# Altium PCB MAGI'sPrototypeBoard.PcbDoc (part 1 of 3)
Units mil, origin at the board's own origin, x right, y up, seen from the top; angles counter-clockwise.
Board outline 6000 x 4000 mil, 2 copper layers (Top Layer, Bottom Layer); 30 components, 124 nets, 1722 pads, 44 vias.
Unrouted connection lines stored in the file: 29.
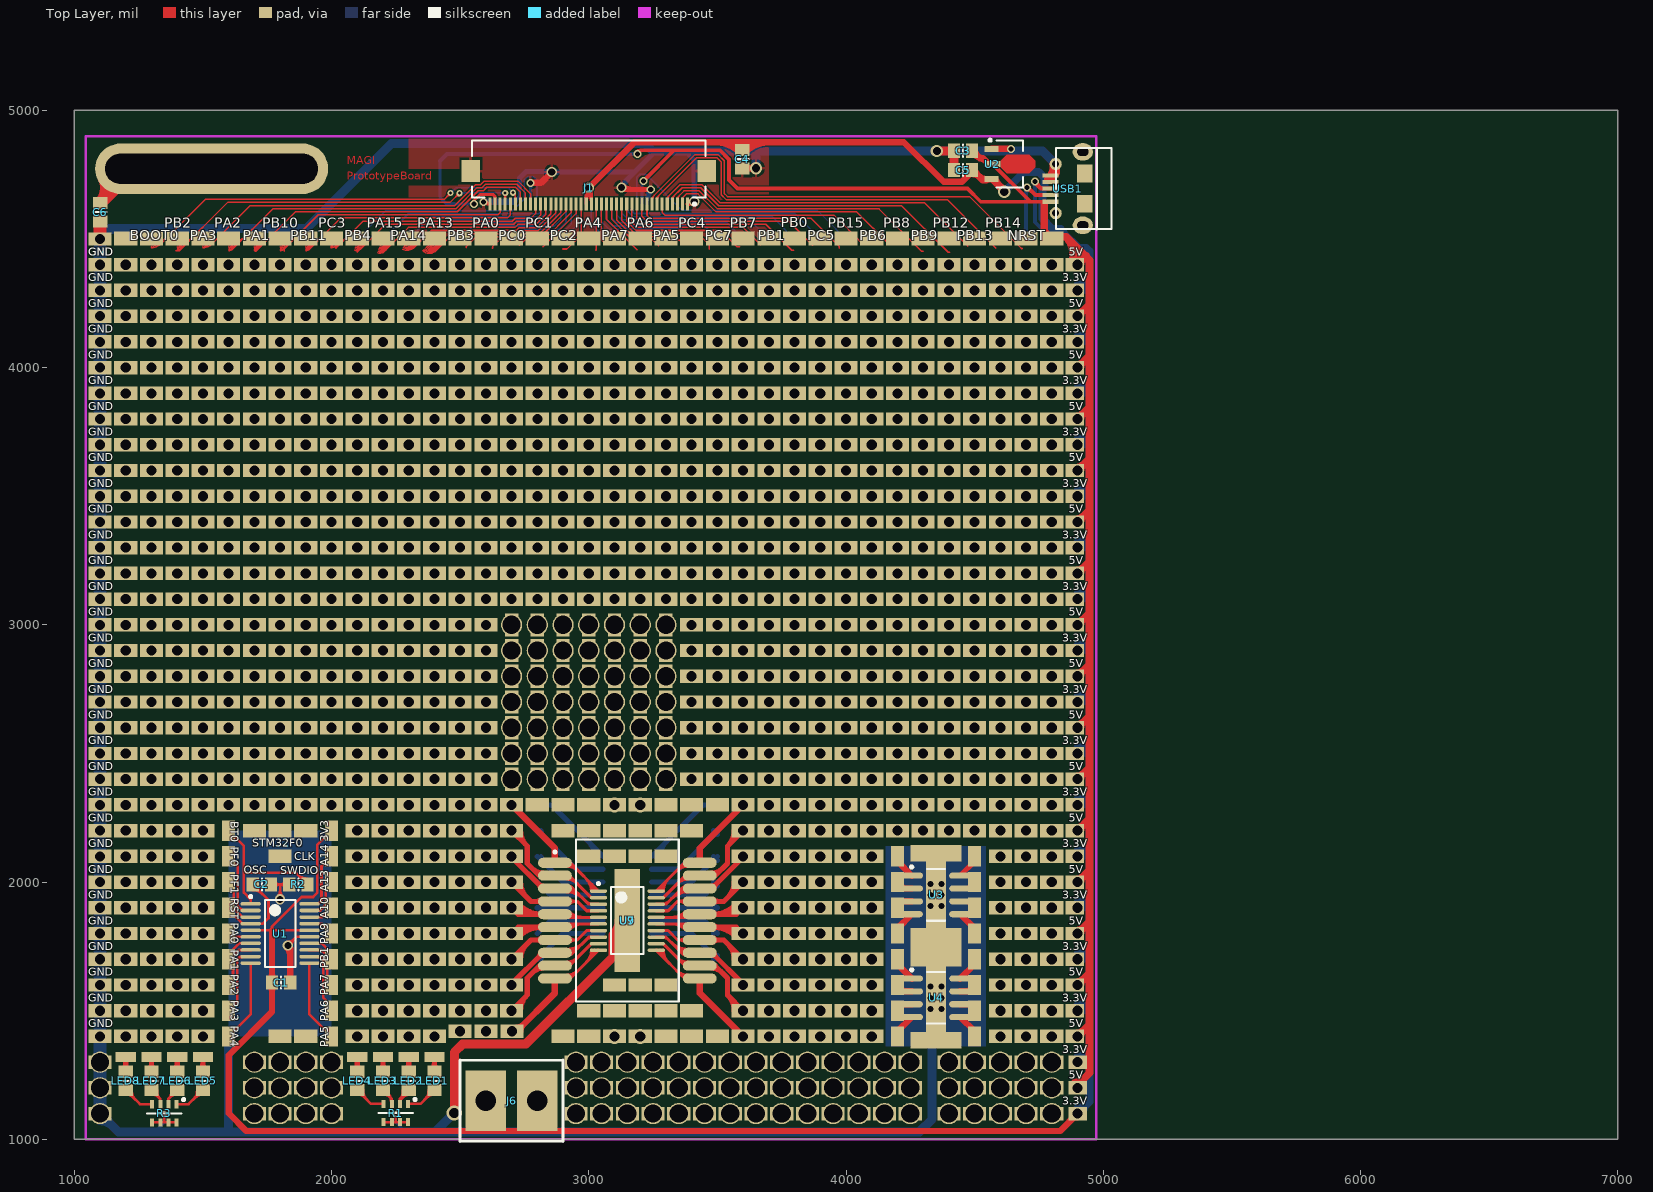
[diagram p0: Top Layer view]
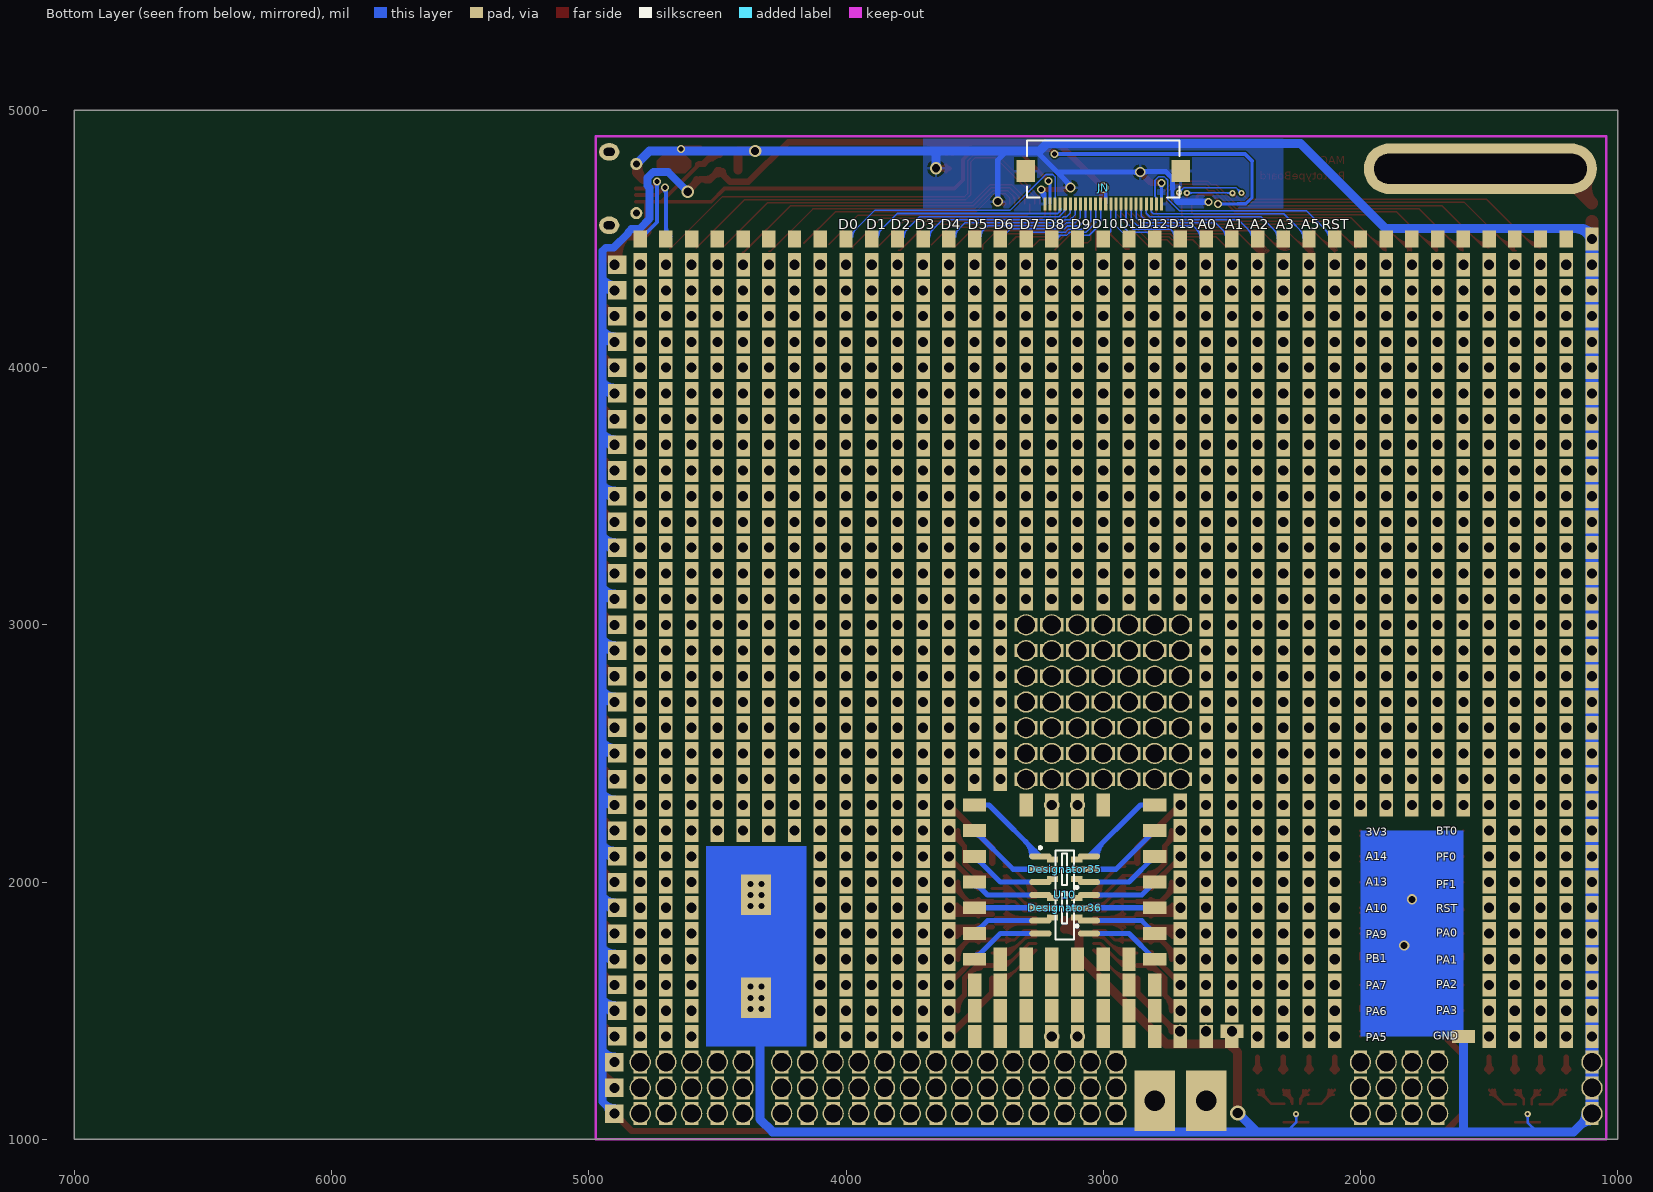
[diagram p1: Bottom Layer view, seen from below]

## Layer stack, top to bottom
Top Solder: solder mask 0.4, Solder Resist, Dk 3.5
Top Layer: signal copper 1.4
Dielectric 1: dielectric 12.6, FR-4, Dk 4.8
Bottom Layer: signal copper 1.4
Bottom Solder: solder mask 0.4, Solder Resist, Dk 3.5

## Board outline
1000,1000 7000,1000 7000,5000 1000,5000

## Design rules (kind name [scope] priority, off if disabled: settings)
Clearance [All] p1: gap=6
ComponentClearance [InNet('No Net') vs InNet('BOOT0')] p1: gap=10 collisioncheckmode=3 verticalgap=10 showdistances=FALSE
PolygonConnect [All] p1: connectstyle=Relief reliefconductorwidth=10 reliefentries=4 polygonreliefangle="90 Angle" airgapwidth=10
RoutingVias [All] p1: holewidth=28 width=50 viastyle="Through Hole" minholewidth=28 minwidth=50 maxholewidth=28 maxwidth=50
SolderMaskExpansion [All] p1: expansion=4
Width [All] p1: maxlimit=100 minlimit=6 preferedwidth=10
28 further rules are at their usual default settings.

## Classes and differential pairs
component class MAGI'sPrototypeBoard: C1 C2 C3 C5 J1 J3 LED1 LED2 LED3 LED4 R1 R2 U1 U2 U3 U4 U7 U9 U10 USB1

## Components (designator, comment, footprint, x,y, rotation, side; value= is the part's Value field where it differs from the comment)
C1 "10uf" 6-0805_n 1803.94,1609.06 r0 top
C2 "100nF" 6-0805_n 1729.13,1990.94 r180 top
C3 "10uf" 6-0805_n 4455,4843 r180 top
C4 "100nF" 6-0805_n 3597,4810 r270 top (schematic designator C2)
C5 "10uf" 6-0805_n 4455,4768 r180 top
C6 "100nF" 6-0805_n 1101,4604 r270 top (schematic designator C2)
Designator35 "Comment" TPS2513 3150,2050 r0 bottom
Designator36 "Comment" TPS2513 3150,1900 r0 bottom
J1 "FPC-40P" FFC/SM0.5-2H40 3000,4700 r180 top
J6 "Comment" 2P-Con 2700,1150 r180 top
JN "Comment" FFC/SM0.5-2H24 3000,4700 r0 bottom
LED1 "LED" 6-0805_N 2400,1227 r270 top
LED2 "LED" 6-0805_N 2300,1227 r270 top
LED3 "LED" 6-0805_N 2200,1227 r270 top
LED4 "LED" 6-0805_N 2100,1227 r270 top
LED5 "LED" 6-0805_N 1500,1227 r270 top
LED6 "LED" 6-0805_N 1400,1227 r270 top
LED7 "LED" 6-0805_N 1300,1227 r270 top
LED8 "LED" 6-0805_N 1200,1227 r270 top
R1 "0603*4" 0603*4 2250,1102 r270 top
R2 "10K" 6-0805_n 1870.87,1990.94 r0 top
R3 "0603*4" 0603*4 1350,1101 r270 top
U1 "STM32F030F4" STM32F030 1800,1800 r0 top
U2 "HS7333" HS7333 4636.92,4791.49 r0 top
U3 "TP4056" TP4056 4350,1950 r0 top
U4 "TP4056" TP4056 4350,1550 r0 top
U7 "MC33886" MC33886 3150,1850 r0 top
U9 "SN74LVC244A" SN74LVC244APWRG 3150,1850 r0 top
U10 "SN74ALVC08" SN74ALVC08D 3150,1950 r180 bottom
USB1 "USB_Micro" MicroUSB-B 4887,4696 r270 top

## Footprints (in the part's own frame and the unit in brackets; to place one, negate y for a bottom-side part, rotate by r counter-clockwise, add the part's x,y. Pads: shape width x height; smd on the part's side, far side on the other; paste and mask are expansions set on the pad)
2P-Con [mm]
  round 4 hole 2: 1(-2.54,0) 2(2.54,0)
  silkscreen extent -5.08,-4 5.08,4
6-0805_n [mm] "Chip Resistor, Body 2.0x1.2mm, IPC Medium Density"
  rect 1.2x1.4 smd: 1(-0.9,0) 2(0.9,0)
  silkscreen extent 0,-0.6 0,0.6, body extent -1.07,-0.7 1.07,0.7, height 0.7
6-0805_N [mm] "Chip Resistor, Body 2.0x1.2mm, IPC Medium Density"
  rect 1.2x1.4 smd: 1(-0.9,0) 2(0.9,0)
  silkscreen extent 0,-0.6 0,0.6, body extent -1.07,-0.7 1.07,0.7, height 0.7
0603*4 [mm]
  rect 0.8x0.4 smd: 1(-0.9,1.2) 2(-0.9,0.4) 3(-0.9,-0.4) 4(-0.9,-1.2) 5(0.9,-1.2) 6(0.9,-0.4) 7(0.9,0.4) 8(0.9,1.2)
  silkscreen extent -1.47,-1.7 0,2.02
FFC/SM0.5-2H24 [mm] "Connector; FH12 Series; 24 Position; 0.5mm Spaced Bottom Contact"
  rect 0.3x1.3 smd: 1(-5.75,1.625) 2(-5.25,1.625) 3(-4.75,1.625) 4(-4.25,1.625) 5(-3.75,1.625) 6(-3.25,1.625) 7(-2.75,1.625) 8(-2.25,1.625) 9(-1.75,1.625) 10(-1.25,1.625) 11(-0.75,1.625) 12(-0.25,1.625) 13(0.25,1.625) 14(0.75,1.625) 15(1.25,1.625) 16(1.75,1.625) 17(2.25,1.625) 18(2.75,1.625) 19(3.25,1.625) 20(3.75,1.625) 21(4.25,1.625) 22(4.75,1.625) 23(5.25,1.625) 24(5.75,1.625)
  rect 1.8x2.2 smd: 25(-7.65,-1.625) 26(7.65,-1.625)
  silkscreen extent -7.55,-4.62 7.55,0.97, body extent -7.55,-4.62 7.55,0.97, height 2
FFC/SM0.5-2H40 [mm] "Connector; FH12 Series; 40 Position; 0.5mm Spaced Bottom Contact"
  rect 0.3x1.3 smd: 1(-9.75,1.625) 2(-9.25,1.625) 3(-8.75,1.625) 4(-8.25,1.625) 5(-7.75,1.625) 6(-7.25,1.625) 7(-6.75,1.625) 8(-6.25,1.625) 9(-5.75,1.625) 10(-5.25,1.625) 11(-4.75,1.625) 12(-4.25,1.625) 13(-3.75,1.625) 14(-3.25,1.625) 15(-2.75,1.625) 16(-2.25,1.625) 17(-1.75,1.625) 18(-1.25,1.625) 19(-0.75,1.625) 20(-0.25,1.625) 21(0.25,1.625) 22(0.75,1.625) 23(1.25,1.625) 24(1.75,1.625) 25(2.25,1.625) 26(2.75,1.625) 27(3.25,1.625) 28(3.75,1.625) 29(4.25,1.625) 30(4.75,1.625) 31(5.25,1.625) 32(5.75,1.625) 33(6.25,1.625) 34(6.75,1.625) 35(7.25,1.625) 36(7.75,1.625) 37(8.25,1.625) 38(8.75,1.625) 39(9.25,1.625) 40(9.75,1.625)
  rect 1.8x2.2 smd: 41(-11.65,-1.625) 42(11.65,-1.625)
  silkscreen extent -11.55,-4.62 11.55,1.75, body extent -11.55,-4.62 11.55,0.97, height 2
HS7333 [mm] "SOT89, 3-Leads, Body 4.50x2.50mm, Pitch 1.50mm, Lead Span 4.1mm, IPC Medium Density"
  rect 1.4x0.6 smd: 1(-1.8,1.5) 3(-1.8,-1.5)
  rect 1.6x0.6 smd: 2(-1.7,0)
  Top Layer region: -0.9,0.3 -0.3,0.9 1.9,0.9 2.5,0.3 2.5,-0.3 1.9,-0.9 -0.3,-0.9 -0.9,-0.3
  silkscreen extent -2.07,-2.3 1.3,2.47, body extent -1.3,-2.3 1.3,2.3, height 1.6
MC33886 [mm]
  oval 3.35x1 smd: 1(-7.15,5.715) 2(-7.15,4.445) 3(-7.15,3.175) 4(-7.15,1.905) 5(-7.15,0.635) 6(-7.15,-0.635) 7(-7.15,-1.905) 8(-7.15,-3.175) 9(-7.15,-4.445) 10(-7.15,-5.715) 11(7.15,-5.715) 12(7.15,-4.445) 13(7.15,-3.175) 14(7.15,-1.905) 15(7.15,-0.635) 16(7.15,0.635) 17(7.15,1.905) 18(7.15,3.175) 19(7.15,4.445) 20(7.15,5.715)
  silkscreen extent -7.27,-8 5.07,8, body extent -5.55,-8 5.55,8, height 3.4
MicroUSB-B [mm]
  oval 1.7x2 hole 0.8 slot 1.1 at 90 deg: 0(-3.625,0.85) 0(3.625,0.85)
  round 1.2 hole 0.7: 0(-2.425,-1.825) 0(2.425,-1.825)
  rect 1.75x1.5 smd: 0(-1.499,1.041) 0(1.499,1.041)
  rect 0.4x1.6 smd: 1(1.3,-2.35) 2(0.65,-2.35) 3(0,-2.35) 4(-0.65,-2.35) 5(-1.3,-2.35)
  silkscreen extent -4,-1.8 4,3.67, body extent -4.1,-1.93 4.1,3.77, height 3
SN74ALVC08D [mm]
  oval 2.2x0.6 smd: 1(-2.4,3.81) 2(-2.4,2.54) 3(-2.4,1.27) 4(-2.4,0) 5(-2.4,-1.27) 6(-2.4,-2.54) 7(-2.4,-3.81) 8(2.4,-3.81) 9(2.4,-2.54) 10(2.4,-1.27) 11(2.4,0) 12(2.4,1.27) 13(2.4,2.54) 14(2.4,3.81)
  silkscreen extent -2.53,-4.4 0.9,4.78, body extent -2,-4.4 2,4.4, height 1.75
SN74LVC244APWRG [mm]
  oval 1.7x0.35 smd: 1(-2.85,2.925) 2(-2.85,2.275) 3(-2.85,1.625) 4(-2.85,0.975) 5(-2.85,0.325) 6(-2.85,-0.325) 7(-2.85,-0.975) 8(-2.85,-1.625) 9(-2.85,-2.275) 10(-2.85,-2.925) 11(2.85,-2.925) 12(2.85,-2.275) 13(2.85,-1.625) 14(2.85,-0.975) 15(2.85,-0.325) 16(2.85,0.325) 17(2.85,0.975) 18(2.85,1.625) 19(2.85,2.275) 20(2.85,2.925)
  silkscreen extent -2.97,-3.3 1.6,3.77, body extent -2.25,-3.3 2.25,3.3, height 1.2
STM32F030 [mm] "TSOP, 20-Leads, Body 6.50x4.40mm, Pitch 0.65mm, IPC Low Density"
  oval 2x0.35 smd: 1(-2.9,2.925) 2(-2.9,2.275) 3(-2.9,1.625) 4(-2.9,0.975) 5(-2.9,0.325) 6(-2.9,-0.325) 7(-2.9,-0.975) 8(-2.9,-1.625) 9(-2.9,-2.275) 10(-2.9,-2.925) 11(2.9,-2.925) 12(2.9,-2.275) 13(2.9,-1.625) 14(2.9,-0.975) 15(2.9,-0.325) 16(2.9,0.325) 17(2.9,0.975) 18(2.9,1.625) 19(2.9,2.275) 20(2.9,2.925)
  silkscreen extent -3.02,-3.3 1.5,3.77, body extent -2.25,-3.3 2.25,3.3, height 1.2
TP4056 [mm] "SOIC, 8-Leads, Body 4.90x3.90mm, Pitch 1.27mm, Thermal Pad 3.40.2x2.00.2mm, IPC Medium Density"
  oval 2.2x0.6 smd: 1(-2.4,1.905) 2(-2.4,0.635) 3(-2.4,-0.635) 4(-2.4,-1.905) 5(2.4,-1.905) 6(2.4,-0.635) 7(2.4,0.635) 8(2.4,1.905)
  rect 2x8 smd: 9(0,0)
  silkscreen extent -2.52,-2.55 0.9,2.88, body extent -2,-2.55 2,2.55, height 1.75
TPS2513 [mm]
  rect 1.1x0.6 smd: 1(-1.2,0.95) 2(-1.2,0) 3(-1.2,-0.95) 4(1.2,-0.95) 5(1.2,0) 6(1.2,0.95)
  silkscreen extent -1.32,-1.55 0.25,1.92, body extent -0.87,-1.52 0.87,1.53, height 1.45

## Part data
C1 C3 C5: library part "CAPACITOR POL", "Capacitor"
C2 C4 C6: library part CAP
J1: library part CON40, "Connector"
LED1 LED2 LED3 LED4 LED5 LED6 LED7 LED8: library part LED_3
R2: library part RES
U9: library part 74LVC244
USB1: "USB"

## Free pads (board coordinates)
  round 39.37 on Top Overlay: 0(2752,2344) 1(4228,2124) 2(4228,1723)
  round 47.24 on Top Paste: 0(4815.15,4600.53) 0(4815.15,4791.47)
  oval 78.74x66.93 on Top Paste: 0(4920.46,4553.28) 0(4920.46,4838.72)
  round 82.68 hole 70.87: 2(2700,2400) 2(2800,2400) 2(2900,2400) 2(3000,2400) 2(3100,2400) 2(3200,2400) 2(3300,2400) 2(3450,1100) 2(3450,1200) 2(3450,1300) 2(3550,1100) 2(3550,1200) 2(3550,1300) 2(3950,1100) 2(3950,1200) 2(3950,1300) 3(1700,1100) 3(1700,1200) 3(1700,1300) 3(2700,2500) 3(2800,2500) 3(2900,2500) 3(3000,2500) 3(3100,2500) 3(3200,2500) 3(3300,2500) 3(3650,1100) 3(3650,1200) 3(3650,1300) 3(4050,1100) 3(4050,1200) 3(4050,1300) 4(1800,1100) 4(1800,1200) 4(1800,1300) 4(2700,2600) 4(2800,2600) 4(2900,2600) 4(3000,2600) 4(3100,2600) 4(3200,2600) 4(3300,2600) 4(3750,1100) 4(3750,1200) 4(3750,1300) 4(4150,1100) 4(4150,1200) 4(4150,1300) 5(1900,1100) 5(1900,1200) 5(1900,1300) 5(2700,2700) 5(2800,2700) 5(2900,2700) 5(3000,2700) 5(3100,2700) 5(3200,2700) 5(3300,2700) 5(3850,1100) 5(3850,1200) 5(3850,1300) 5(4250,1100) 5(4250,1200) 5(4250,1300) 6(1100,1100) 6(1100,1200) 6(1100,1300) 6(2000,1100) 6(2000,1200) 6(2000,1300) 6(2700,2800) 6(2800,2800) 6(2900,2800) 6(3000,2800) 6(3100,2800) 6(3200,2800) 6(3300,2800) 7(2700,2900) 7(2800,2900) 7(2900,2900) 7(3000,2900) 7(3100,2900) 7(3200,2900) 7(3300,2900) 7(4400,1100) 7(4400,1200) 7(4400,1300) 8(2700,2900) 8(2800,2900) 8(2900,2900) 8(3000,2900) 8(3100,2900) 8(3200,2900) 8(3300,2900) 8(4400,1100) 8(4400,1200) 8(4400,1300) 9(2700,3000) 9(2800,3000) 9(2900,3000) 9(2950,1100) 9(2950,1200) 9(2950,1300) 9(3000,3000) 9(3100,3000) 9(3200,3000) 9(3300,3000) 9(4500,1100) 9(4500,1200) 9(4500,1300) 10(3050,1100) 10(3050,1200) 10(3050,1300) 10(4600,1100) 10(4600,1200) 10(4600,1300) 11(3150,1100) 11(3150,1200) 11(3150,1300) 11(4700,1100) 11(4700,1200) 11(4700,1300) 12(3250,1100) 12(3250,1200) 12(3250,1300) 12(4800,1100) 12(4800,1200) 12(4800,1300) 13(3350,1100) 13(3350,1200) 13(3350,1300)
  round 39.37 on Bottom Overlay: 3(2753,2343) 4(4228,2123) 5(4228,1724)
  rect 98.43x400 smd: 14(3150,1850)
  rect 78.74x40 smd: 23(1200,1320) 24(1300,1320) 25(1400,1320) 26(1500,1320) 27(2100,1320) 28(2200,1320) 29(2300,1320) 30(2400,1320)
  rect 50x78.74 smd: 31(1600,2200) 32(1600,2100) 33(1600,2000) 34(1600,1900) 35(1600,1800) 36(1600,1700) 37(1600,1600) 38(1600,1500) 39(1600,1400) 40(2000,2100) 40(2000,2200) 41(2000,2000) 42(2000,1900) 43(2000,1800) 44(2000,1700) 45(2000,1600) 46(2000,1500) 47(2000,1400) 48(4500,1700) 49(4500,1600) 50(4500,1500) 51(4500,1400) 52(4200,1400) 53(4200,1500) 54(4200,1600) 55(4200,1700) 56(4200,1800) 57(4200,1900) 58(4200,2000) 59(4200,2100) 60(4500,2100) 61(4500,2000) 62(4500,1900) 63(4500,1800)
  rect 90x52 / inner rect 40x40 / far side rect 52x90 all layers, no hole: 62(1100,1100) 62(1100,1200) 62(1100,1300) 62(1700,1100) 62(1700,1200) 62(1700,1300) 62(1800,1100) 62(1800,1200) 62(1800,1300) 62(1900,1100) 62(1900,1200) 62(1900,1300) 62(2000,1100) 62(2000,1200) 62(2000,1300) 62(2950,1100) 62(2950,1200) 62(2950,1300) 62(3050,1100) 62(3050,1200) 62(3050,1300) 62(3150,1100) 62(3150,1200) 62(3150,1300) 62(3250,1100) 62(3250,1200) 62(3250,1300) 62(3350,1100) 62(3350,1200) 62(3350,1300) 62(3450,1100) 62(3450,1200) 62(3450,1300) 62(3550,1100) 62(3550,1200) 62(3550,1300) 62(3650,1100) 62(3650,1200) 62(3650,1300) 62(3750,1100) 62(3750,1200) 62(3750,1300) 62(3850,1100) 62(3850,1200) 62(3850,1300) 62(3950,1100) 62(3950,1200) 62(3950,1300) 62(4050,1100) 62(4050,1200) 62(4050,1300) 62(4150,1100) 62(4150,1200) 62(4150,1300) 62(4250,1100) 62(4250,1200) 62(4250,1300) 62(4400,1100) 62(4400,1200) 62(4400,1300) 62(4500,1100) 62(4500,1200) 62(4500,1300) 62(4600,1100) 62(4600,1200) 62(4600,1300) 62(4700,1100) 62(4700,1200) 62(4700,1300) 62(4800,1100) 62(4800,1200) 62(4800,1300)
  rect 90x52 / inner rect 40x40 / far side rect 52x90 hole 39.37: 62(1100,2600) 62(1100,4500) 62(1200,1900) 62(1200,2600) 62(1300,1900) 62(1300,2600) 62(1400,1900) 62(1400,2600) 62(1500,1900) 62(1500,2600) 62(1600,2600) 62(1700,2600) 62(1800,2600) 62(1900,2600) 62(2000,2600) 62(2100,1900) 62(2100,2600) 62(2200,1900) 62(2200,2600) 62(2300,1900) 62(2300,2600) 62(2400,1900) 62(2400,2600) 62(2500,1700) 62(2500,2600) 62(2600,1700) 62(2600,2600) 62(3400,2600) 62(3500,2600) 62(3600,2600) 62(3700,1900) 62(3700,2600) 62(3800,1900) 62(3800,2600) 62(3900,1900) 62(3900,2600) 62(4000,1900) 62(4000,2600) 62(4100,1900) 62(4100,2600) 62(4200,2600) 62(4300,2600) 62(4400,2600) 62(4500,2600) 62(4600,1900) 62(4600,2600) 62(4700,1900) 62(4700,2600) 62(4800,1900) 62(4800,2600) 63(1100,2500) 63(1200,1800) 63(1200,2500) 63(1300,1800) 63(1300,2500) 63(1400,1800) 63(1400,2500) 63(1500,1800) 63(1500,2500) 63(1600,2500) 63(1700,2500) 63(1800,2500) 63(1900,2500) 63(2000,2500) 63(2100,1800) 63(2100,2500) 63(2200,1800) 63(2200,2500) 63(2300,1800) 63(2300,2500) 63(2400,1800) 63(2400,2500) 63(2500,1600) 63(2500,2300) 63(2500,2500) 63(2600,1600) 63(2600,2300) 63(2600,2500) 63(3400,2500) 63(3500,2500) 63(3600,2500) 63(3700,1800) 63(3700,2500) 63(3800,1800) 63(3800,2500) 63(3900,1800) 63(3900,2500) 63(4000,1800) 63(4000,2500) 63(4100,1800) 63(4100,2500) 63(4200,2500) 63(4300,2500) 63(4400,2500) 63(4500,2500) 63(4600,1800) 63(4600,2500) 63(4700,1800) 63(4700,2500) 63(4800,1800) 63(4800,2500) 64(1100,2400) 64(1100,4400) 64(1200,1700) 64(1200,2400) 64(1200,4400) 64(1300,1700) 64(1300,2400) 64(1300,4400) 64(1400,1700) 64(1400,2400) 64(1400,4400) 64(1500,1700) 64(1500,2400) 64(1500,4400) 64(1600,2400) 64(1600,4400) 64(1700,2400) 64(1700,4400) 64(1800,2400) 64(1800,4400) 64(1900,2400) 64(1900,4400) 64(2000,2400) 64(2000,4400) 64(2100,1700) 64(2100,2400) 64(2100,4400) 64(2200,1700) 64(2200,2400) 64(2200,4400) 64(2300,1700) 64(2300,2400) 64(2300,4400) 64(2400,1700) 64(2400,2400) 64(2400,4400) 64(2500,1500) 64(2500,2200) 64(2500,2400) 64(2500,4400) 64(2600,1500) 64(2600,2200) 64(2600,2400) 64(2600,4400) 64(2700,1500) 64(2700,1600) 64(2700,1700) 64(2700,1800) 64(2700,1900) 64(2700,2000) 64(2700,2100) 64(2700,2200) 64(2700,2300) 64(2700,4400) 64(2800,4400) 64(2900,4400) 64(3000,4400) 64(3100,4400) 64(3200,4400) 64(3300,4400) 64(3400,2400) 64(3400,4400) 64(3500,2400) 64(3500,4400) 64(3600,2400) 64(3600,4400) 64(3700,1700) 64(3700,2400) 64(3700,4400) 64(3800,1700) 64(3800,2400) 64(3800,4400) 64(3900,1700) 64(3900,2400) 64(3900,4400) 64(4000,1700) 64(4000,2400) 64(4000,4400) 64(4100,1700) 64(4100,2400) 64(4100,4400) 64(4200,2400) 64(4200,4400) 64(4300,2400) 64(4300,4400) 64(4400,2400) 64(4400,4400) 64(4500,2400) 64(4500,4400) 64(4600,1700) 64(4600,2400) 64(4600,4400) 64(4700,1700) 64(4700,2400) 64(4700,4400) 64(4800,1700) 64(4800,2400) 64(4800,4400) 65(1100,2300) 65(1100,4300) 65(1200,4300) 65(1300,4300) 65(1400,4300) 65(1500,4300) 65(1600,4300) 65(1700,4300) 65(1800,4300) 65(1900,4300) 65(2000,4300) 65(2100,4300) 65(2200,4300) 65(2300,4300) 65(2400,4300) 65(2500,4300) 65(2600,4300) 65(2700,4300) 65(2800,4300) 65(2900,4300) 65(3000,4300) 65(3100,4300) 65(3200,4300) 65(3300,4300) 65(3400,4300) 65(3500,4300) 65(3600,2300) 65(3600,4300) 65(3700,4300) 65(3800,4300) 65(3900,4300) 65(4000,4300) 65(4100,4300) 65(4200,4300) 65(4300,4300) 65(4400,4300) 65(4500,4300) 65(4600,4300) 65(4700,4300) 65(4800,4300) 66(1100,2200) 66(1100,4200) 66(1200,4200) 66(1300,4200) 66(1400,4200) 66(1500,4200) 66(1600,4200) 66(1700,4200) 66(1800,4200) 66(1900,4200) 66(2000,4200) 66(2100,4200) 66(2200,4200) 66(2300,4200) 66(2400,4200) 66(2500,4200) 66(2600,4200) 66(2700,4200) 66(2800,4200) 66(2900,4200) 66(3000,4200) 66(3100,4200) 66(3200,4200) 66(3300,4200) 66(3400,4200) 66(3500,4200) 66(3600,2200) 66(3600,4200) 66(3700,4200) 66(3800,4200) 66(3900,4200) 66(4000,4200) 66(4100,4200) 66(4200,4200) 66(4300,4200) 66(4400,4200) 66(4500,4200) 66(4600,4200) 66(4700,4200) 66(4800,4200) 67(1100,2100) 67(1100,4100) 67(1200,4100) 67(1300,4100) 67(1400,4100) 67(1500,4100) 67(1600,4100) 67(1700,4100) 67(1800,4100) 67(1900,4100) 67(2000,4100) 67(2100,4100) 67(2200,4100) 67(2300,4100) 67(2400,4100) 67(2500,4100) 67(2600,4100) 67(2700,4100) 67(2800,4100) 67(2900,4100) 67(3000,4100) 67(3100,4100) 67(3200,4100) 67(3300,4100) 67(3400,4100) 67(3500,4100) 67(3600,2100) 67(3600,4100) 67(3700,4100) 67(3800,4100) 67(3900,4100) 67(4000,4100) 67(4100,4100) 67(4200,4100) 67(4300,4100) 67(4400,4100) 67(4500,4100) 67(4600,4100) 67(4700,4100) 67(4800,4100) 68(1100,2000) 68(1100,4000) 68(1200,4000) 68(1300,4000) 68(1400,4000) 68(1500,4000) 68(1600,4000) 68(1700,4000) 68(1800,4000) 68(1900,4000) 68(2000,4000) 68(2100,4000) 68(2200,4000) 68(2300,4000) 68(2400,4000) 68(2500,4000) 68(2600,4000) 68(2700,4000) 68(2800,4000) 68(2900,4000) 68(3000,4000) 68(3100,4000) 68(3200,4000) 68(3300,4000) 68(3400,4000) 68(3500,4000) 68(3600,2000) 68(3600,4000) 68(3700,4000) 68(3800,4000) 68(3900,4000) 68(4000,4000) 68(4100,4000) 68(4200,4000) 68(4300,4000) 68(4400,4000) 68(4500,4000) 68(4600,4000) 68(4700,4000) 68(4800,4000) 69(1100,1900) 69(1100,3900) 69(1200,3900) 69(1300,3900) 69(1400,3900) 69(1500,3900) 69(1600,3900) 69(1700,3900) 69(1800,3900) 69(1900,3900) 69(2000,3900) 69(2100,3900) 69(2200,3900) 69(2300,3900) 69(2400,3900) 69(2500,3900) 69(2600,3900) 69(2700,3900) 69(2800,3900) 69(2900,3900) 69(3000,3900) 69(3100,3900) 69(3200,3900) 69(3300,3900) 69(3400,3900) 69(3500,3900) 69(3600,1900) 69(3600,3900) 69(3700,3900) 69(3800,3900) 69(3900,3900) 69(4000,3900) 69(4100,3900) 69(4200,3900) 69(4300,3900) 69(4400,3900) 69(4500,3900) 69(4600,3900) 69(4700,3900) 69(4800,3900) 70(1100,1800) 70(1100,3800) 70(1200,3800) 70(1300,3800) 70(1400,3800) 70(1500,3800) 70(1600,3800) 70(1700,3800) 70(1800,3800) 70(1900,3800) 70(2000,3800) 70(2100,3800) 70(2200,3800) 70(2300,3800) 70(2400,3800) 70(2500,3800) 70(2600,3800) 70(2700,3800) 70(2800,3800) 70(2900,3800) 70(3000,3800) 70(3100,3800) 70(3200,3800) 70(3300,3800) 70(3400,3800) 70(3500,3800) 70(3600,1800) 70(3600,3800) 70(3700,3800) 70(3800,3800) 70(3900,3800) 70(4000,3800) 70(4100,3800) 70(4200,3800) 70(4300,3800) 70(4400,3800) 70(4500,3800) 70(4600,3800) 70(4700,3800) 70(4800,3800) 72(1100,1700) 72(1100,3700) 72(1200,3700) 72(1300,3700) 72(1400,3700) 72(1500,3700) 72(1600,3700) 72(1700,3700) 72(1800,3700) 72(1900,3700) 72(2000,3700) 72(2100,3700) 72(2200,3700) 72(2300,3700) 72(2400,3700) 72(2500,3700) 72(2600,3700) 72(2700,3700) 72(2800,3700) 72(2900,3700) 72(3000,3700) 72(3100,3700) 72(3200,3700) 72(3300,3700) 72(3400,3700) 72(3500,3700) 72(3600,1700) 72(3600,3700) 72(3700,3700) 72(3800,3700) 72(3900,3700) 72(4000,3700) 72(4100,3700) 72(4200,3700) 72(4300,3700) 72(4400,3700) 72(4500,3700) 72(4600,3700) 72(4700,3700) 72(4800,3700) 73(1100,1600) 73(1100,3600) 73(1200,3600) 73(1300,3600) 73(1400,3600) 73(1500,3600) 73(1600,3600) 73(1700,3600) 73(1800,3600) 73(1900,3600) 73(2000,3600) 73(2100,3600) 73(2200,3600) 73(2300,3600) 73(2400,3600) 73(2500,3600) 73(2600,3600) 73(2700,3600) 73(2800,3600) 73(2900,3600) 73(3000,3600) 73(3100,3600) 73(3200,3600) 73(3300,3600) 73(3400,3600) 73(3500,3600) 73(3600,1600) 73(3600,3600) 73(3700,3600) 73(3800,3600) 73(3900,3600) 73(4000,3600) 73(4100,3600) 73(4200,3600) 73(4300,3600) 73(4400,3600) 73(4500,3600) 73(4600,3600) 73(4700,3600) 73(4800,3600) 74(1100,1500) 74(1100,3500) 74(1200,3500) 74(1300,3500) 74(1400,3500) 74(1500,3500) 74(1600,3500) 74(1700,3500) 74(1800,3500) 74(1900,3500) 74(2000,3500) 74(2100,3500) 74(2200,3500) 74(2300,3500) 74(2400,3500) 74(2500,3500) 74(2600,3500) 74(2700,3500) 74(2800,3500) 74(2900,3500) 74(3000,3500) 74(3100,3500) 74(3200,3500) 74(3300,3500) 74(3400,3500) 74(3500,3500) 74(3600,1500) 74(3600,3500) 74(3700,3500) 74(3800,3500) 74(3900,3500) 74(4000,3500) 74(4100,3500) 74(4200,3500) 74(4300,3500) 74(4400,3500) 74(4500,3500) 74(4600,3500) 74(4700,3500) 74(4800,3500) 75(1100,1400) 75(1100,3400) 75(1200,3400) 75(1300,3400) 75(1400,3400) 75(1500,3400) 75(1600,3400) 75(1700,3400) 75(1800,3400) 75(1900,3400) 75(2000,3400) 75(2100,3400) 75(2200,3400) 75(2300,3400) 75(2400,3400) 75(2500,3400) 75(2600,3400) 75(2700,3400) 75(2800,3400) 75(2900,3400) 75(3000,3400) 75(3100,3400) 75(3200,3400) 75(3300,3400) 75(3400,3400) 75(3500,3400) 75(3600,1400) 75(3600,3400) 75(3700,3400) 75(3800,3400) 75(3900,3400) 75(4000,3400) 75(4100,3400) 75(4200,3400) 75(4300,3400) 75(4400,3400) 75(4500,3400) 75(4600,3400) 75(4700,3400) 75(4800,3400) 76(1100,3000) 76(1100,3200) 76(1200,1600) 76(1200,2300) 76(1200,3000) 76(1200,3200) 76(1300,1600) 76(1300,2300) 76(1300,3000) 76(1300,3200) 76(1400,1600) 76(1400,2300) 76(1400,3000) 76(1400,3200) 76(1500,1600) 76(1500,2300) 76(1500,3000) 76(1500,3200) 76(1600,2300) 76(1600,3000) 76(1600,3200) 76(1700,2300) 76(1700,3000) 76(1700,3200) 76(1800,2300) 76(1800,3000) 76(1800,3200) 76(1900,2300) 76(1900,3000) 76(1900,3200) 76(2000,2300) 76(2000,3000) 76(2000,3200) 76(2100,1600) 76(2100,2300) 76(2100,3000) 76(2100,3200) 76(2200,1600) 76(2200,2300) 76(2200,3000) 76(2200,3200) 76(2300,1600) 76(2300,2300) 76(2300,3000) 76(2300,3200) 76(2400,1600) 76(2400,2300) 76(2400,3000) 76(2400,3200) 76(2500,2100) 76(2500,3000) 76(2500,3200) 76(2600,2100) 76(2600,3000) 76(2600,3200) 76(2700,3200) 76(2800,3200) 76(2900,3200) 76(3000,3200) 76(3100,3200) 76(3200,3200) 76(3300,3200) 76(3400,3000) 76(3400,3200) 76(3500,3000) 76(3500,3200) 76(3600,3000) 76(3600,3200) 76(3700,1600) 76(3700,2300) 76(3700,3000) 76(3700,3200) 76(3800,1600) 76(3800,2300) 76(3800,3000) 76(3800,3200) 76(3900,1600) 76(3900,2300) 76(3900,3000) 76(3900,3200) 76(4000,1600) 76(4000,2300) 76(4000,3000) 76(4000,3200) 76(4100,1600) 76(4100,2300) 76(4100,3000) 76(4100,3200) 76(4200,2200) 76(4200,2300) 76(4200,3000) 76(4200,3200) 76(4300,2200) 76(4300,2300) 76(4300,3000) 76(4300,3200) 76(4400,2200) 76(4400,2300) 76(4400,3000) 76(4400,3200) 76(4500,2200) 76(4500,2300) 76(4500,3000) 76(4500,3200) 76(4600,1600) 76(4600,2300) 76(4600,3000) 76(4600,3200) 76(4700,1600) 76(4700,2300) 76(4700,3000) 76(4700,3200) 76(4800,1600) 76(4800,2300) 76(4800,3000) 76(4800,3200) 77(1100,3300) 77(1200,3300) 77(1300,3300) 77(1400,3300) 77(1500,3300) 77(1600,3300) 77(1700,3300) 77(1800,3300) 77(1900,3300) 77(2000,3300) 77(2100,3300) 77(2200,3300) 77(2300,3300) 77(2400,3300) 77(2500,3300) 77(2600,3300) 77(2700,3300) 77(2800,3300) 77(2900,3300) 77(3000,3300) 77(3100,3300) 77(3200,3300) 77(3300,3300) 77(3400,3300) 77(3500,3300) 77(3600,3300) 77(3700,3300) 77(3800,3300) 77(3900,3300) 77(4000,3300) 77(4100,3300) 77(4200,3300) 77(4300,3300) 77(4400,3300) 77(4500,3300) 77(4600,3300) 77(4700,3300) 77(4800,3300) 78(1100,2700) 78(1100,2800) 78(1100,2900) 78(1100,3100) 78(1200,1400) 78(1200,1500) 78(1200,2000) 78(1200,2100) 78(1200,2200) 78(1200,2700) 78(1200,2800) 78(1200,2900) 78(1200,3100) 78(1300,1400) 78(1300,1500) 78(1300,2000) 78(1300,2100) 78(1300,2200) 78(1300,2700) 78(1300,2800) 78(1300,2900) 78(1300,3100) 78(1400,1400) 78(1400,1500) 78(1400,2000) 78(1400,2100) 78(1400,2200) 78(1400,2700) 78(1400,2800) 78(1400,2900) 78(1400,3100) 78(1500,1400) 78(1500,1500) 78(1500,2000) 78(1500,2100) 78(1500,2200) 78(1500,2700) 78(1500,2800) 78(1500,2900) 78(1500,3100) 78(1600,2700) 78(1600,2800) 78(1600,2900) 78(1600,3100) 78(1700,2700) 78(1700,2800) 78(1700,2900) 78(1700,3100) 78(1800,2700) 78(1800,2800) 78(1800,2900) 78(1800,3100) 78(1900,2700) 78(1900,2800) 78(1900,2900) 78(1900,3100) 78(2000,2700) 78(2000,2800) 78(2000,2900) 78(2000,3100) 78(2100,1400) 78(2100,1500) 78(2100,2000) 78(2100,2100) 78(2100,2200) 78(2100,2700) 78(2100,2800) 78(2100,2900) 78(2100,3100) 78(2200,1400) 78(2200,1500) 78(2200,2000) 78(2200,2100) 78(2200,2200) 78(2200,2700) 78(2200,2800) 78(2200,2900) 78(2200,3100) 78(2300,1400) 78(2300,1500) 78(2300,2000) 78(2300,2100) 78(2300,2200) 78(2300,2700) 78(2300,2800) 78(2300,2900) 78(2300,3100) 78(2400,1400) 78(2400,1500) 78(2400,2000) 78(2400,2100) 78(2400,2200) 78(2400,2700) 78(2400,2800) 78(2400,2900) 78(2400,3100) 78(2500,1800) 78(2500,1900) 78(2500,2000) 78(2500,2700) 78(2500,2800) 78(2500,2900) 78(2500,3100) 78(2600,1800) 78(2600,1900) 78(2600,2000) 78(2600,2700) 78(2600,2800) 78(2600,2900) 78(2600,3100) 78(2700,3100) 78(2800,3100) 78(2900,3100) 78(3000,3100) 78(3100,3100) 78(3200,3100) 78(3300,3100) 78(3400,2700) 78(3400,2800) 78(3400,2900) 78(3400,3100) 78(3500,2700) 78(3500,2800) 78(3500,2900) 78(3500,3100) 78(3600,2700) 78(3600,2800) 78(3600,2900) 78(3600,3100) 78(3700,1400) 78(3700,1500) 78(3700,2000) 78(3700,2100) 78(3700,2200) 78(3700,2700) 78(3700,2800) 78(3700,2900) 78(3700,3100) 78(3800,1400) 78(3800,1500) 78(3800,2000) 78(3800,2100) 78(3800,2200) 78(3800,2700) 78(3800,2800) 78(3800,2900) 78(3800,3100) 78(3900,1400) 78(3900,1500) 78(3900,2000) 78(3900,2100) 78(3900,2200) 78(3900,2700) 78(3900,2800) 78(3900,2900) 78(3900,3100) 78(4000,1400) 78(4000,1500) 78(4000,2000) 78(4000,2100) 78(4000,2200) 78(4000,2700) 78(4000,2800) 78(4000,2900) 78(4000,3100) 78(4100,1400) 78(4100,1500) 78(4100,2000) 78(4100,2100) 78(4100,2200) 78(4100,2700) 78(4100,2800) 78(4100,2900) 78(4100,3100) 78(4200,2700) 78(4200,2800) 78(4200,2900) 78(4200,3100) 78(4300,2700) 78(4300,2800) 78(4300,2900) 78(4300,3100) 78(4400,2700) 78(4400,2800) 78(4400,2900) 78(4400,3100) 78(4500,2700) 78(4500,2800) 78(4500,2900) 78(4500,3100) 78(4600,1400) 78(4600,1500) 78(4600,2000) 78(4600,2100) 78(4600,2200) 78(4600,2700) 78(4600,2800) 78(4600,2900) 78(4600,3100) 78(4700,1400) 78(4700,1500) 78(4700,2000) 78(4700,2100) 78(4700,2200) 78(4700,2700) 78(4700,2800) 78(4700,2900) 78(4700,3100) 78(4800,1400) 78(4800,1500) 78(4800,2000) 78(4800,2100) 78(4800,2200) 78(4800,2700) 78(4800,2800) 78(4800,2900) 78(4800,3100)
  rect 52x65 smd far side: 62(1200,4500) 62(1300,4500) 62(1400,4500) 62(1500,4500) 62(1600,4500) 62(1700,4500) 62(1800,4500) 62(1900,4500) 62(2000,4500) 62(2100,4500) 62(2200,4500) 62(2300,4500) 62(2400,4500) 62(2500,4500) 62(2600,4500) 62(2700,4500) 62(2800,4500) 62(2900,4500) 62(3000,4500) 62(3100,4500) 62(3200,4500) 62(3300,4500) 62(3400,4500) 62(3500,4500) 62(3600,4500) 62(3700,4500) 62(3800,4500) 62(3900,4500) 62(4000,4500) 62(4100,4500) 62(4200,4500) 62(4300,4500) 62(4400,4500) 62(4500,4500) 62(4600,4500) 62(4700,4500) 62(4800,4500)
  rect 90x55 smd: 62(1200,4502) 62(1300,4502) 62(1400,4502) 62(1500,4502) 62(1600,4502) 62(1700,4502) 62(1800,4502) 62(1900,4502) 62(2000,4502) 62(2100,4502) 62(2200,4502) 62(2300,4502) 62(2400,4502) 62(2500,4502) 62(2600,4502) 62(2700,4502) 62(2800,4502) 62(2900,4502) 62(3000,4502) 62(3100,4502) 62(3200,4502) 62(3300,4502) 62(3400,4502) 62(3500,4502) 62(3600,4502) 62(3700,4502) 62(3800,4502) 62(3900,4502) 62(4000,4502) 62(4100,4502) 62(4200,4502) 62(4300,4502) 62(4400,4502) 62(4500,4502) 62(4600,4502) 62(4700,4502) 62(4800,4502)
  rect 52x90 / inner rect 40x40 / far side rect 90x52 all layers, no hole: 62(2700,2400) 62(2700,2500) 62(2700,2600) 62(2700,2700) 62(2700,2800) 62(2700,2900) 62(2700,3000) 62(2800,2400) 62(2800,2500) 62(2800,2600) 62(2800,2700) 62(2800,2800) 62(2800,2900) 62(2800,3000) 62(2900,2400) 62(2900,2500) 62(2900,2600) 62(2900,2700) 62(2900,2800) 62(2900,2900) 62(2900,3000) 62(3000,2400) 62(3000,2500) 62(3000,2600) 62(3000,2700) 62(3000,2800) 62(3000,2900) 62(3000,3000) 62(3100,2400) 62(3100,2500) 62(3100,2600) 62(3100,2700) 62(3100,2800) 62(3100,2900) 62(3100,3000) 62(3200,2400) 62(3200,2500) 62(3200,2600) 62(3200,2700) 62(3200,2800) 62(3200,2900) 62(3200,3000) 62(3300,2400) 62(3300,2500) 62(3300,2600) 62(3300,2700) 62(3300,2800) 62(3300,2900) 62(3300,3000)
  rect 72x52 / inner rect 40x40 / far side rect 72x72 all layers, no hole: 62(4900,1100) 62(4900,1200) 62(4900,1300)
  rect 72x52 / inner rect 40x40 / far side rect 72x72 hole 39.37 copper offset -10,0: 62(4900,2600) 63(4900,2500) 64(4900,2400) 64(4900,4400) 65(4900,2300) 65(4900,4300) 66(4900,2200) 66(4900,4200) 67(4900,2100) 67(4900,4100) 68(4900,2000) 68(4900,4000) 69(4900,1900) 69(4900,3900) 70(4900,1800) 70(4900,3800) 72(4900,1700) 72(4900,3700) 73(4900,1600) 73(4900,3600) 74(4900,1500) 74(4900,3500) 75(4900,1400) 75(4900,3400) 76(4900,3000) 76(4900,3200) 77(4900,3300) 78(4900,2700) 78(4900,2800) 78(4900,2900) 78(4900,3100)
  rect 90x52 / inner rect 40x40 / far side rect 90x52 hole 39.37: 64(2500,1420)
  rect 90x52 / inner rect 40x40 / far side round 52 hole 39.37: 64(2600,1420) 64(2701,1420)
  rect 196.85x62.99 smd: 64(4350,2112) 68(4350,1385)
  rect 196.85x78.74 smd: 65(4350,1783) 66(4350,1712)
  rect 118.11x157.48 smd far side: 69(4350,1950) 70(4350,1550)
  rect 90x50 smd far side: 73(2800,2300) 74(2800,2200) 75(2800,2100) 76(2800,2000) 77(2800,1900) 78(2800,1800) 79(1600,1400) 79(2800,1700) 80(3500,1700) 81(3500,1800) 82(3500,1900) 83(3500,2000) 84(3500,2100) 85(3500,2200) 86(3500,2300)
  rect 157.48x236.22 all layers, no hole: 88(2800,1150) 89(2600,1150)
  rect 90x52 smd: 92(2800,2300) 93(2900,2300) 94(3000,2300) 95(3100,2300) 96(3200,2300) 97(3300,2300) 98(3400,2300) 99(3500,2300) 100(2900,2200) 101(3000,2200) 102(3100,2200) 103(3200,2200) 104(3300,2200) 105(3400,2200) 106(3000,2100) 107(3100,2100) 108(3200,2100) 109(3300,2100) 112(3300,1600) 113(3200,1600) 114(3200,1500) 115(3300,1500) 116(3400,1500) 117(3100,1500) 118(3000,1500) 118(3100,1600) 121(2900,1400) 122(3000,1400) 123(3100,1400) 124(3200,1400) 125(3300,1400) 126(3400,1400) 127(3500,1400) 129(1800,2100) 130(1700,2200) 131(1800,2200) 132(1900,2200) 133(1800,1400) 134(1900,1400)
  rect 52x90 smd far side: 118(2500,1400) 118(2600,1400) 118(2700,1400) 118(2800,1400) 118(2900,1400) 118(2900,1500) 118(3000,1500) 118(3000,1600) 118(3100,1600) 118(3100,1700) 118(3200,1700) 135(2800,1600) 136(2800,1500) 137(2900,1700) 138(2900,1600) 139(3000,1700) 140(3000,1400) 141(3100,1400) 142(3200,1400) 143(3300,1400) 144(3400,1400) 145(3500,1400) 146(3500,1500) 147(3400,1500) 148(3300,1500) 149(3200,1500) 150(3100,1500) 151(3200,1600) 152(3300,1600) 153(3400,1600) 154(3500,1600) 155(3300,1700) 156(3400,1700) 157(3100,2200) 158(3200,2200) 159(3200,2300) 160(3100,2300) 161(3000,2300) 162(3300,2300)
  oval 905.51x196.85 hole 118.11 slot 826.77 at 0 deg: 164(1534,4773)

## Via types
v1: diameter 35.43, hole 23.62, Top Layer to Bottom Layer, tented both sides, 12 vias
v2: diameter 31.5, hole 19.68, Top Layer to Bottom Layer, tented both sides, 9 vias
v3: diameter 24, hole 12, Top Layer to Bottom Layer, tented both sides, 6 vias
v4: diameter 39.37, hole 27.56, Top Layer to Bottom Layer, tented both sides, 6 vias
v5: diameter 59.06, hole 39.37, Top Layer to Bottom Layer, tented both sides, 5 vias
v6: diameter 47.24, hole 39.37, Top Layer to Bottom Layer, 3 vias
v7: diameter 47.24, hole 31.5, Top Layer to Bottom Layer, tented both sides, 3 vias